# Altium PCB pyESP32mini.PcbDoc
Units mil, origin at the board's own origin, x right, y up, seen from the top; angles counter-clockwise.
Board outline 1395 x 1100 mil, 2 copper layers (Top Layer, Bottom Layer); 27 components, 42 nets, 155 pads, 36 vias.
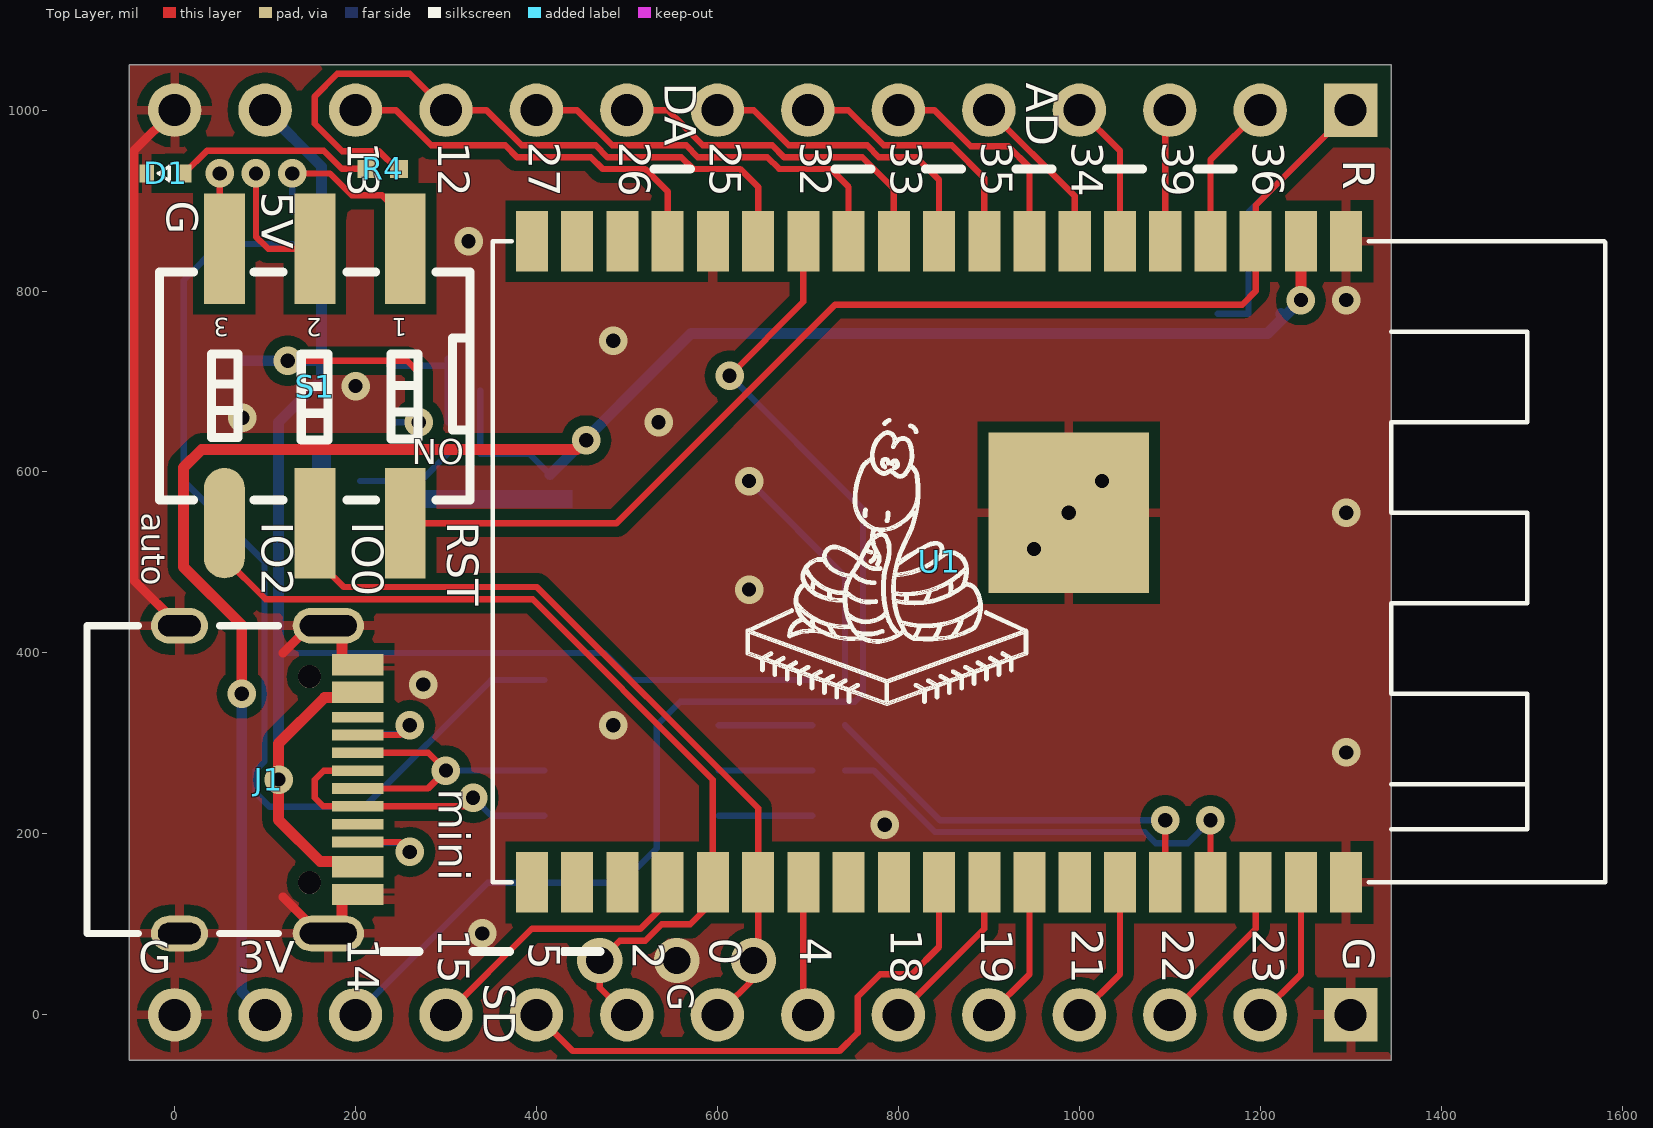
[diagram p0: Top Layer view]
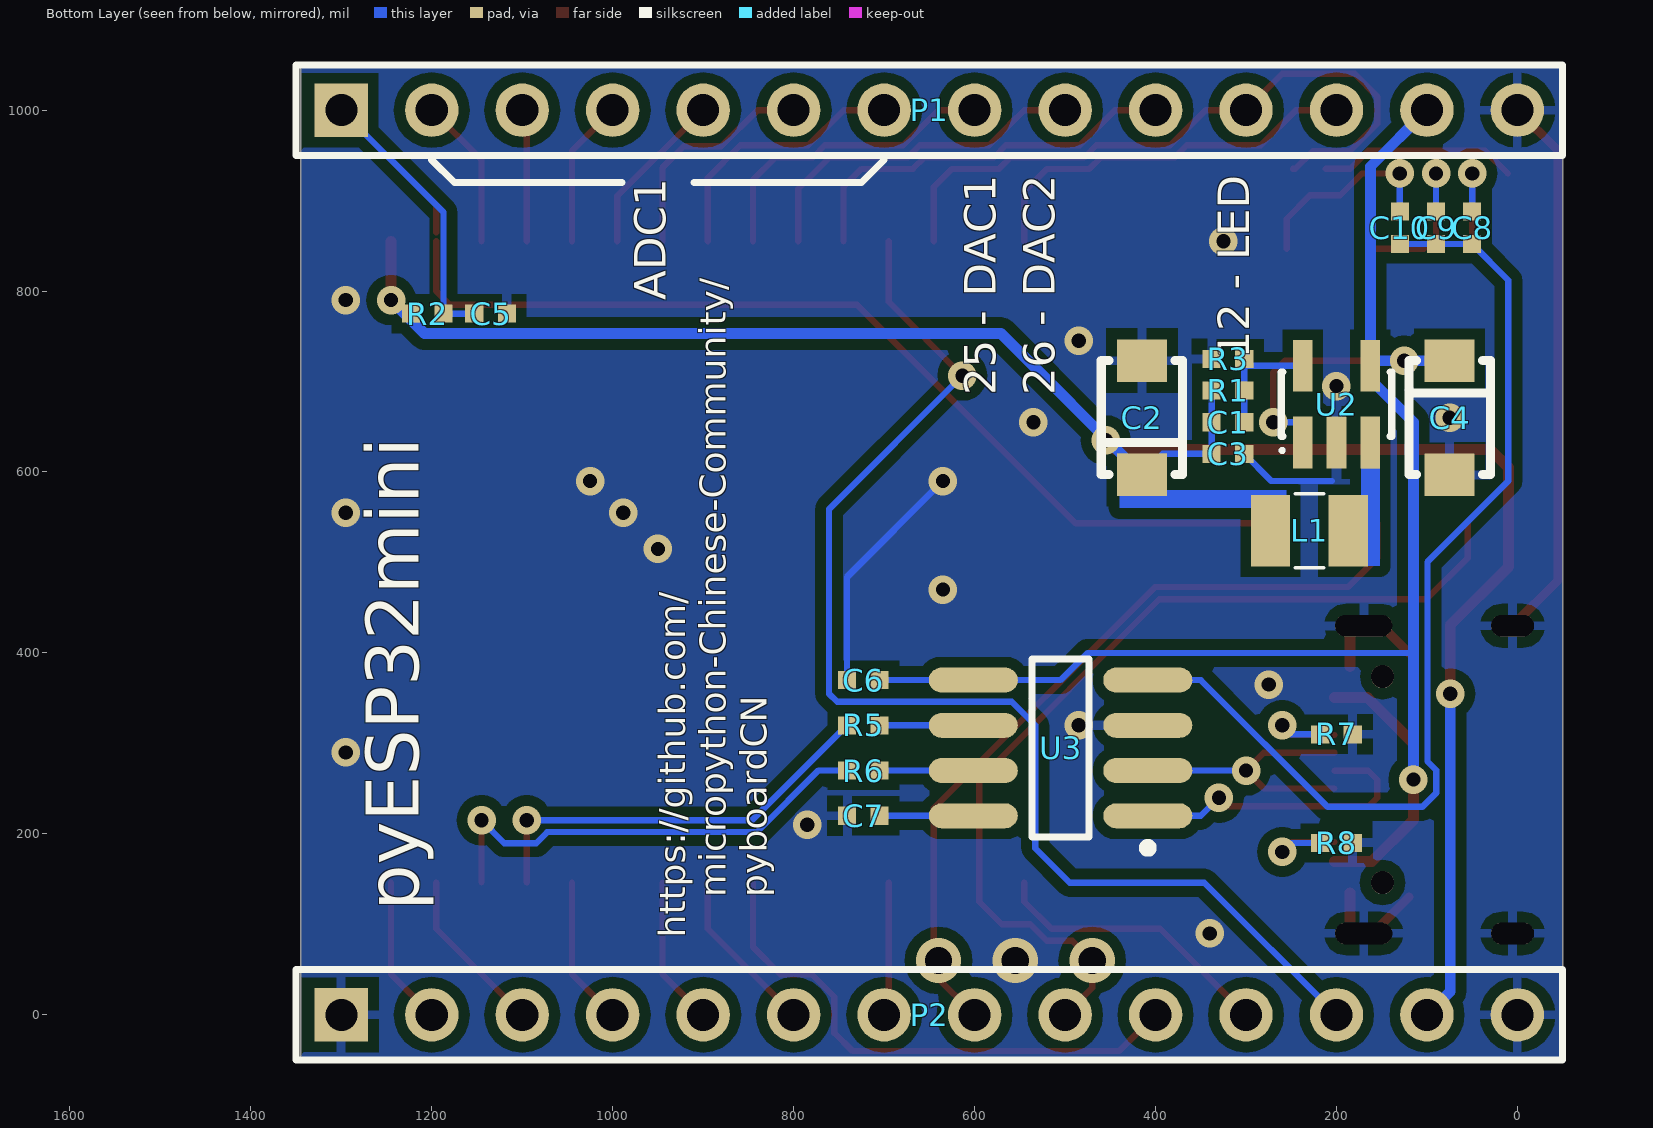
[diagram p1: Bottom Layer view, seen from below]
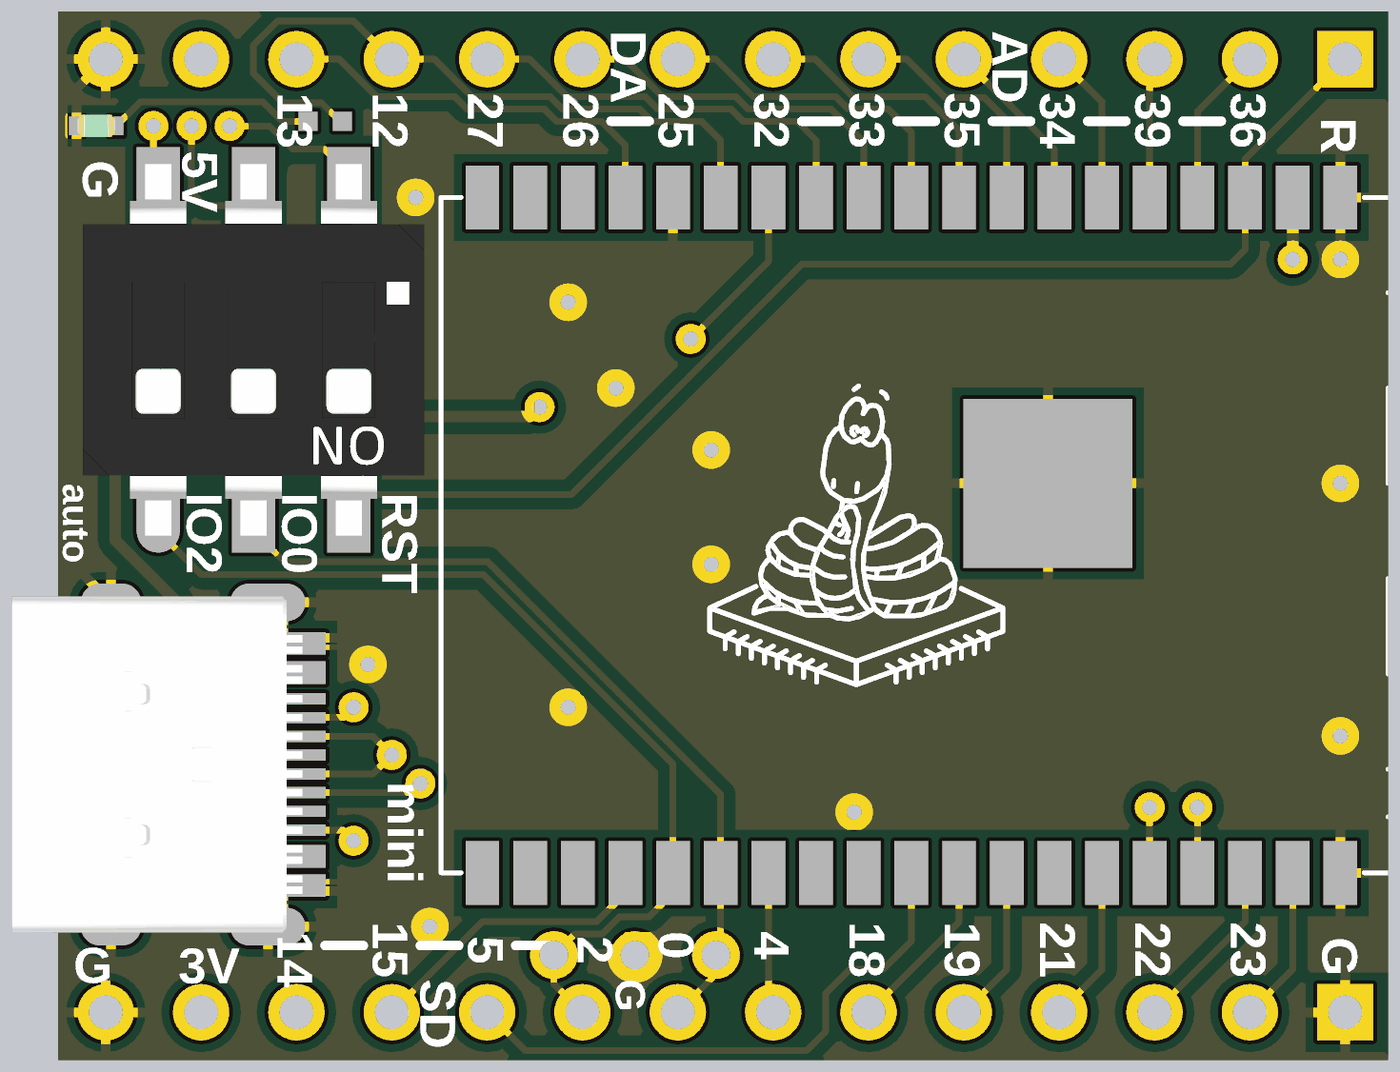
[diagram p2: 3D render of the assembled board from above, using the file's embedded part models]
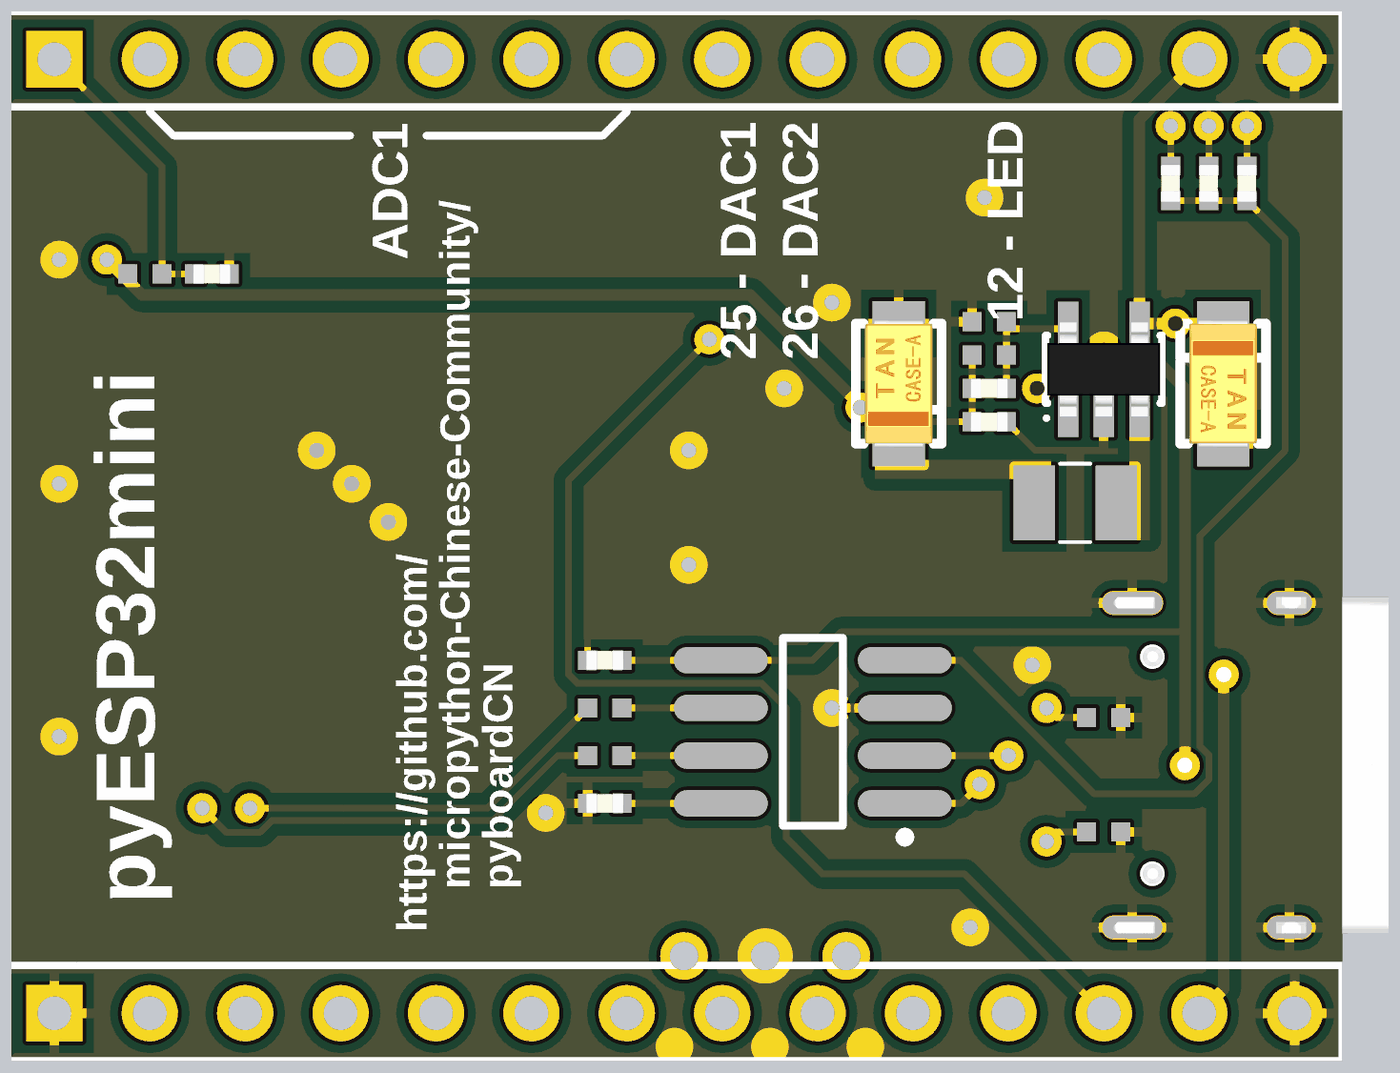
[diagram p3: 3D render of the assembled board from below, using the file's embedded part models]

## Layer stack, top to bottom
Top Layer: signal copper 1.4
Dielectric: dielectric 12.6, FR-4, Dk 4.8
Bottom Layer: signal copper 1.4

## Board outline
-50,-50 -50,1050 1345,1050 1345,-50

## Design rules (kind name [scope] priority, off if disabled: settings)
Clearance Clearance_1 [InPolygon] p1: gap=12
Clearance [All] p2: gap=6
ComponentClearance [All] p1 off: gap=10 collisioncheckmode=3 verticalgap=10 showdistances=FALSE
Height [All] p1 off: minheight=0 maxheight=1000 prefheight=500
PolygonConnect PolygonConnect_1 [IsVia] p1: connectstyle=Direct reliefconductorwidth=10 reliefentries=4 polygonreliefangle="90 Angle"
PolygonConnect [All] p2: connectstyle=Relief reliefconductorwidth=10 reliefentries=4 polygonreliefangle="90 Angle"
RoutingVias [All] p1: holewidth=28 width=50 viastyle="Through Hole" minholewidth=28 minwidth=50 maxholewidth=28 maxwidth=50
SilkscreenOverComponentPads [All] p1: minsilkscreentomaskgap=10
SolderMaskExpansion [All] p1: expansion=4
Width [All] p1: maxlimit=20 minlimit=7 preferedwidth=7
25 further rules are at their usual default settings.

## Components (designator, comment, footprint, x,y, rotation, side; value= is the part's Value field where it differs from the comment)
C1 "22p" C0402 320,655 r0 bottom
C2 "47uF" 3216 415,660 r90 bottom
C3 "100n" C0402 320,620 r0 bottom
C4 "47uF" 3216 75,660 r270 bottom
C5 "100n" C0402 1135,775 r0 bottom
C6 "100n" C0402 723,370 r0 bottom
C7 "100n" C0402 723,220 r180 bottom
C8 "4.7u" C0402 50,870 r270 bottom
C9 "4.7u" C0402 90,870 r270 bottom
C10 "2.2u" C0402 130,870 r270 bottom
D1 "LED GREEN" LED0402_GREEN -10,930 r180 top
J1 "Type C 16p" "Type-C 16P" 170,260 r270 top
L1 "2.2uH" IND-252012 230,535 r180 bottom
P1 "Header 14" HDR1X14 1300,1000 r180 bottom
P2 "Header 14" HDR1X14 1300,0 r180 bottom
R1 "91K" SMD0402 320,690 r0 bottom
R2 "10K" SMD0402 1205,775 r0 bottom
R3 "20K" SMD0402 320,725 r180 bottom
R4 "2K" SMD0402 230,935 r0 top
R5 "470" SMD0402 723,320 r0 bottom
R6 "470" SMD0402 723,270 r0 bottom
R7 "5.1k" SMD0402 200,310 r180 bottom
R8 "5.1k" SMD0402 200,190 r180 bottom
S1 "SW DIP-3" SW-SMD3 155,695 r180 top
U1 "ESP32-WROVER" ESP32-WROVER 345,855 r270 top
U2 "HX3406" SOT23-5 200,675 r180 bottom
U3 "CH330N" NSO8_M 505,295 r0 bottom

## Footprints (in the part's own frame and the unit in brackets; to place one, negate y for a bottom-side part, rotate by r counter-clockwise, add the part's x,y. Pads: shape width x height; smd on the part's side, far side on the other; paste and mask are expansions set on the pad)
3216 [mm]
  rect 1.2x1.4 smd: 1(-1.6,0) 2(1.6,0)
  silkscreen extent -1.6,-1.14 1.6,1.14, body extent -1.7,-0.9 1.7,0.9, height 1.8
C0402 [mil]
  rect 20x20 smd: 1(-18,0) 2(18,0)
  body extent -20,-10 20,10, height 14
ESP32-WROVER [mil] "ESP32-WROVER"
  rect 66.93x35.43 smd: 1(0,950) 2(0,900) 3(0,850) 4(0,800) 5(0,750) 6(0,700) 7(0,650) 8(0,600) 9(0,550) 10(0,500) 11(0,450) 12(0,400) 13(0,350) 14(0,300) 15(0,250) 16(0,200) 17(0,150) 18(0,100) 19(0,50) 20(708.66,50) 21(708.66,100) 22(708.66,150) 23(708.66,200) 24(708.66,250) 25(708.66,300) 26(708.66,350) 27(708.66,400) 28(708.66,450) 29(708.66,500) 30(708.66,550) 31(708.66,600) 32(708.66,650) 33(708.66,700) 34(708.66,750) 35(708.66,800) 36(708.66,850) 37(708.66,900) 38(708.66,950)
  rect 177.17x177.17 smd: 39(300,643.31)
  silkscreen extent 0,7 709,1236, body extent 0,5 710,1235, height 138
HDR1X14 [mm] "Connector; Header; 14 Position"
  rect 1.5x1.5 hole 0.9: 1(0,0)
  round 1.5 hole 0.9: 2(2.54,0) 3(5.08,0) 4(7.62,0) 5(10.16,0) 6(12.7,0) 7(15.24,0) 8(17.78,0) 9(20.32,0) 10(22.86,0) 11(25.4,0) 12(27.94,0) 13(30.48,0) 14(33.02,0)
  silkscreen extent -1.27,-1.27 34.29,1.27
IND-252012 [mm]
  rect 1.1x2 smd: 1(1.092,0) 2(-1.092,0)
  silkscreen extent -0.4,-1.04 0.4,1.04, body extent -1.3,-1 1.3,1, height 1.2
LED0402_GREEN [mm]
  rect 0.4x0.5 smd: 1(-0.525,0) 2(0.525,0)
  silkscreen extent -0.1,-0.2 0.2,0.2, body extent -0.5,-0.3 0.5,0.3, height 0.19
NSO8_M [mm]
  oval 2.5x0.7 smd: 1(-2.45,1.905) 2(-2.45,0.635) 3(-2.45,-0.635) 4(-2.45,-1.905) 5(2.45,-1.905) 6(2.45,-0.635) 7(2.45,0.635) 8(2.45,1.905)
  silkscreen extent -2.57,-2.5 0.8,2.93, body extent -2.87,-2.46 2.91,2.44, height 1.45
SMD0402 [mil]
  rect 20x20 smd: 1(-18,0) 2(18,0)
  body extent -20,-10 20,10, height 14
SOT23-5 [mm] "SOT-23/SC-74A; 5 Leads; Body 3 x 3 mm, inc. leads (LxW max)"
  rect 0.55x1.45 smd: 1(-0.95,-1.075) 2(0,-1.075) 3(0.95,-1.075) 4(0.95,1.075) 5(-0.95,1.075)
  silkscreen extent -1.58,-1.35 1.55,0.9, body extent -1.5,-1.25 1.5,1.25, height 1.05
SW-SMD3 [mm]
  rect 1.15x3.1 smd: 1(-2.54,-3.85) 2(0,-3.85) 3(2.54,-3.85) 5(0,3.85) 6(-2.54,3.85)
  oval 1.15x3.1 smd: 4(2.54,3.85)
  silkscreen extent -4.36,-3.2 4.36,3.2, body extent -4.54,-4.95 4.55,4.95, height 4.05
"Type-C 16P" [mm]
  rect 0.3x1.45 smd: A1(-3.375,0.82) A4(-2.6,0.82) A5(-1.25,0.82) A6(-0.25,0.82) A7(0.25,0.82) A8(1.25,0.82) A9(2.6,0.82) A12(3.375,0.82) B1(3.075,0.82) B4(2.3,0.82) B5(1.75,0.82) B6(0.75,0.82) B7(-0.75,0.82) B8(-1.75,0.82) B9(-2.3,0.82) B12(-3.075,0.82)
  oval 1x2 smd: E1(-4.32,0) E4(4.32,0)
  oval 0.6x1.6 hole 0.6 slot 1.6 at 90 deg: E1(-4.32,0) E4(4.32,0)
  oval 1x1.6 smd: E2(-4.32,-4.18) E3(4.32,-4.18)
  oval 0.6x1.2 hole 0.6 slot 1.2 at 90 deg: E2(-4.32,-4.18) E3(4.32,-4.18)
  round 0.65 hole 0.65 unplated: ""(-2.89,-0.53) ""(2.89,-0.53)
  silkscreen extent -4.32,-6.78 4.32,-1.4, body extent -4.48,-6.83 4.48,0.92, height 3.26

## Part data
C1 C3 C5 C6 C7 C8 C9 C10: library part Cap
C2 C4: library part E
D1: library part LED-GREEN, "Green LED"
L1: library part Inductor
P1 P2: "Header, 14-Pin"
R1 R2 R3 R4 R5 R6 R7 R8: library part Res
S1: "DIP Switch, 3 Position, SPST"
U2: library part SY8089

## Free pads (board coordinates)
  round 39.37 on Bottom Solder: 0(450,-35) 0(550,-35) 0(650,-35)

## Via types
v1: diameter 31.5, hole 15.75, Top Layer to Bottom Layer, 33 vias
v2: diameter 50, hole 30, Top Layer to Bottom Layer, 3 vias

## Nets (pads, with @x,y where several pads share a name; then routed paths per layer and width w, separated by ;. In a path a pad name is that pad's centre, name@x,y a point inside that pad or via, vN(x,y) a via of type N, cw(c..) or ccw(c..) an arc to the next point about the centre after c; other vN are vias at no path point)
3V3: C1.2 C2.1 C3.2 L1.2 P2.13 R1.2 R2.2 U1.2 | length 2237.1
  Top Layer w12: v1(74.25,355) 74.25,430.75 10,495 10,605 30,625 445,625 v1(455,635) ; v1(1245,790) U1.2
  Bottom Layer w7: C1.2 R1.2 ; C1.2@338,660 C3.2 392,620 C2.1
  Bottom Layer w12: v1(74.25,355) 74.25,25.75 P2.13 ; C2.1 571,753 1208,753 v1(1245,790) ; R2.2@1223,774.03 R2.2
5V: C4.1 C6.1 J1.A4 J1.A9 J1.B4 J1.B9 P1.13 U2.1 U2.4 U3.5 | length 2004.5
  Top Layer w7: v1(125,722.99) 257.01,722.99 270,710 v1(270,655)
  Top Layer w12: J1.B4 160.97,169.45 115,215.42 v1(115,260) 115,300 165.55,350.55 J1.B9
  Bottom Layer w7: 115,400 475,400 505,370 U3.5 C6.1 ; U2.1@240,655 v1(270,655)
  Bottom Layer w12: C4.1 80,722.99 v1(125,722.99) 162.6,722.99 162.6,937.4 P1.13 ; v1(115,260) 115,400 115,655 162.6,702.6 U2.4
DM: J1.A7 J1.B7 U3.2 | length 320.3
  Top Layer w7: J1.A7 280.16,250.16 v1(300,270) 280.47,289.53 J1.B7
  Bottom Layer w7: v1(300,270) U3.2
DP: J1.A6 J1.B6 U3.1 | length 341.1
  Top Layer w7: J1.A6 164.84,269.84 155,260 155,240 164.53,230.47 J1.B6 320.47,230.47 v1(330,240)
  Bottom Layer w7: v1(330,240) 350,220 U3.1
FB: C1.1 R1.1 R3.2 U2.5 | length 132.3
  Bottom Layer w7: U2.5 R3.2@299.68,717.32 ; C1.1 R3.2
GND: C2.2 C3.1 C4.2 C5.1 C6.2 C7.1 D1.2 J1.A1 J1.A12 J1.B1 J1.B12 J1.E1 J1.E2 J1.E3 J1.E4 P1.14 P2.1 P2.14 R3.1 R7.2 R8.2 U1.1 U1.15 U1.38 U1.39 U2.2 U3.3 | length 1201.8
  Top Layer w10: P1.14 -45,955 -45,480.51 J1.E2@5.43,430.08 ; 120,130 160.08,89.92 J1.E4@170,89.92 ; 120,400 150.08,430.08 J1.E1@170,430.08
  Top Layer w12: J1.E4@185,90 J1.B1@185,135 ; J1.B12@185,385 J1.E1@185,430
  Bottom Layer w7: 205,590 272,590 C3.1 ; v1(635,590) 741,484 C6.2
  other v1: 340,90 785,210 1295,290 485,320 275,365 635,470 950,515 988.31,555 1295,555 1025,590 535,655 75,660 200,695 485,745 1295,790 325,855
  other v2: 555,60
IO0: P2.8 S1.5 U1.25 | length 890
  Top Layer w7: S1.5 155,505 187.1,472.9 400.48,472.9 645,228.38 U1.25 645,65 645,45 P2.8
  other v2: 640,60
IO2: P2.9 S1.4 U1.24 | length 1039.3
  Top Layer w7: S1.4 55,505 100.74,459.26 395.74,459.26 595,260 U1.24 595,125 570,100 538.38,100 520.38,82 492,82 v2(470,60) 470,30 P2.9
IO4: P2.7 U1.26 | length 148.4
  Top Layer w7: U1.26 695,5 P2.7
IO5: P2.10 U1.29 | length 604
  Top Layer w7: P2.10 440,-40 735,-40 755,-20 755,20 780,45 815,45 845,75 U1.29
IO12: P1.11 R4.2 U1.14 | length 755.8
  Top Layer w7: R4.2 245.44,935 225.94,954.5 185.5,954.5 155,985 155,1015 180,1040 260,1040 P1.11 344.81,1000 383.83,960.97 465.45,960.97 478.45,947.97 560.06,947.97 573.06,934.97 625,934.97 645,914.97 U1.14
IO13: P1.12 U1.16 | length 437.3
  Top Layer w7: P1.12 244.81,1000 283.83,960.97 365.45,960.97 378.45,947.97 460.06,947.97 473.06,934.97 520,934.97 545,909.97 U1.16
IO14: P2.12 U1.13 | length 1382.6
  Top Layer w7: v1(613.5,706.5) 695,788 U1.13
  Bottom Layer w7: P2.12 346,146 495,146 533,184 533,320 559,346 752,346 761,355 761,559 v1(613.5,706.5)
IO15: P2.11 U1.23 | length 318.1
  Top Layer w7: P2.11 395,95 515,95 545,125 U1.23
IO18: P2.6 U1.30 | length 185.7
  Top Layer w7: P2.6 895,95 U1.30
IO19: P2.5 U1.31 | length 165
  Top Layer w7: P2.5 945,45 U1.31
IO21: P2.4 U1.33 | length 165
  Top Layer w7: P2.4 1045,45 U1.33
IO22: P2.3 U1.36 | length 185.7
  Top Layer w7: P2.3 1195,95 U1.36
IO23: P2.2 U1.37 | length 165
  Top Layer w7: P2.2 1245,45 U1.37
IO25: P1.8 U1.10 | length 344.9
  Top Layer w7: P1.8 640,1000 679.03,960.97 765.45,960.97 778.45,947.97 820,947.97 845,922.97 U1.10
IO26: P1.9 U1.11 | length 389.2
  Top Layer w7: P1.9 545,1000 560.97,984.03 560.97,983.83 583.83,960.97 660.64,960.97 673.64,947.97 760.06,947.97 795,913.04 U1.11
IO27: P1.10 U1.12 | length 440.2
  Top Layer w7: P1.10 444.81,1000 483.83,960.97 565.45,960.97 578.45,947.97 655.26,947.97 668.26,934.97 725,934.97 745,914.97 U1.12
IO32: P1.7 U1.9 | length 296.1
  Top Layer w7: P1.7 744.81,1000 783.83,960.97 859.03,960.97 895,925 U1.9
IO33: P1.6 U1.8 | length 252.9
  Top Layer w7: P1.6 840,1000 880,960 921.62,960 945,936.62 U1.8
IO34: P1.4 U1.6 | length 163.6
  Top Layer w7: P1.4 1045,955 U1.6
IO35: P1.5 U1.7 | length 184.4
  Top Layer w7: P1.5 995,905 U1.7
IO36: P1.2 U1.4 | length 167.8
  Top Layer w7: U1.4 1145,945 P1.2
IO39: P1.3 U1.5 | length 140
  Top Layer w7: U1.5 P1.3@1095,995
NetC7_2: C7.2 U3.8 | length 103.5
  Bottom Layer w7: U3.8 C7.2
NetC8_1: C8.1 S1.3 | length 120.4
  Top Layer w7: S1.3@50,851.57 v1(50,930)
  Bottom Layer w7: C8.1 v1(50,930)
NetC9_1: C9.1 S1.2 | length 182.6
  Top Layer w7: v1(90,930) 90,860 103.43,846.57 S1.2
  Bottom Layer w7: C9.1 v1(90,930)
NetC10_1: C10.1 S1.1 | length 221.1
  Top Layer w7: v1(130,930) 171.57,930 195.79,905.79 229.21,905.79 255,880 S1.1
  Bottom Layer w7: C10.1 v1(130,930)
NetD1_1: D1.1 R4.1 | length 220.2
  Top Layer w7: D1.1 35.92,955.25 164.75,955.25 185,935 R4.1
NetJ1_A5: J1.A5 R7.1 | length 108.3
  Top Layer w7: J1.A5 249.21,309.21 v1(260,320)
  Bottom Layer w7: R7.1 250,310 v1(260,320)
NetJ1_B5: J1.B5 R8.1 | length 108.5
  Top Layer w7: J1.B5 248.9,191.1 v1(260,180)
  Bottom Layer w7: R8.1 250,190 v1(260,180)
NetL1_1: L1.1 U2.3
NetR5_1: R5.1 U3.6 | length 103.5
  Bottom Layer w7: U3.6 R5.1
NetR6_1: R6.1 U3.7 | length 103.5
  Bottom Layer w7: U3.7 R6.1
RST: C5.2 P1.1 R2.1 S1.6 U1.3 | length 1585.6
  Top Layer w7: S1.6 488.43,543.43 730,785 1180,785 1195,800 U1.3 ; U1.3@1195,865 1195,895 P1.1
  Bottom Layer w7: C5.2 R2.1 1187,887 P1.1
U_RTS: C8.2 C9.2 C10.2 U3.4 | length 1127.5
  Bottom Layer w7: C10.2 C8.2 10,812 10,590 99.5,500.5 99.5,280.21 89.75,270.46 89.75,245.25 105,230 210,230 350,370 U3.4
U_RX: R6.2 U1.35 | length 516.4
  Top Layer w7: U1.35 v1(1145,215)
  Bottom Layer w7: R6.2 772.62,270 840.62,202 1072.29,202 1084.54,189.75 1119.75,189.75 v1(1145,215)
U_TX: R5.2 U1.34 | length 466.2
  Top Layer w7: U1.34 v1(1095,215)
  Bottom Layer w7: R5.2 846,215 v1(1095,215)
pads on no net: J1. J1.A8 J1.B8 U1.17 U1.18 U1.19 U1.20 U1.21 U1.22 U1.27 U1.28 U1.32

## Polygon pours and split planes (outlines as drawn)
GND on Top Layer "Top Layer-No Net" (solid, remove dead copper, pour order 6): -50,-50 1345,-50 1345,1050 -50,1050
GND on Bottom Layer "Top Layer-No Net" (solid, remove dead copper, pour order 8): -50,1050 -50,-50 1345,-50 1345,1050

## Other copper
Bottom Layer:
  rectangle net NetL1_1: 152,496 173,626
  rectangle net 3V3: 255,560 440,580

## Silkscreen, mask and mechanical layers (free items; w line width, h text height)
Top Overlay:
  drawing of 617 lines, arcs and shapes, not listed
  text "DA" at 530,1030 h60 r270
  text "AD" at 930,1030 h60 r270
  text "13" at 180,965 h60 r270
  text "12" at 280,965 h60 r270
  text "27" at 380,965 h60 r270
  text "26" at 480,965 h60 r270
  text "25" at 580,965 h60 r270
  text "32" at 680,965 h60 r270
  text "33" at 780,965 h60 r270
  text "35" at 880,965 h60 r270
  text "34" at 980,965 h60 r270
  text "39" at 1080,965 h60 r270
  text "36" at 1180,965 h60 r270
  text "R" at 1280,945 h60 r270
  text "5V" at 85,910 h60 r270
  text "G" at -20,900 h60 r270
  text "auto" at -45,555 h45 r270
  text "IO2" at 85,545 h60 r270
  text "IO0" at 185,545 h60 r270
  text "RST" at 290,545 h60 r270
  text "mini" at 280.16,250.16 h59.06 r270
  text "15" at 280,95 h60 r270
  text "18" at 780,95 h60 r270
  text "19" at 880,95 h60 r270
  text "21" at 980,95 h60 r270
  text "22" at 1080,95 h60 r270
  text "23" at 1180,95 h60 r270
  text "14" at 180,85 h60 r270
  text "0" at 580,85 h60 r270
  text "4" at 680,85 h60 r270
  text "G" at 1280,85 h60 r270
  text "5" at 380,80 h60 r270
  text "2" at 495,80 h60 r270
  text "G" at -40,35 h60
  text "3V" at 70,35 h60
  text "SD" at 330,35 h60 r270
  text "G" at 535,35 h50 r270
Bottom Overlay:
  lines w7.87: 700,945 725,920 910,920 ; 990,920 1175,920 1200,945
  text "ADC1" at 930,790 h60 r270
  text "12 - LED" at 285,725 h60 r270
  text "26 - DAC2" at 500,685 h60 r270
  text "25 - DAC1" at 565,685 h60 r270
  text "pyboardCN" at 820,130 h50 r270
  text "micropython-Chinese-Community/" at 865,130 h50 r270
  text "pyESP32mini" at 1195,115 h100 r270
  text "https://github.com/" at 910,85 h50 r270
Mechanical 1:
  the board outline again, w7.87

## Dimensions
-50,-50 to -50,1050 on Mechanical 1
-50,50 to 1345,-50 on Mechanical 1

## Text inside footprints (layer, text, board x,y; h text height)
S1: Top Overlay "3" at 60.51,769.8 h19.68 r180; Top Overlay "2" at 162.87,769.8 h19.68 r180; Top Overlay "1" at 257.36,769.8 h19.68 r180; Top Overlay "ON" at 320.35,635.94 h27.56 r180